# Altium PCB Ender-3.PcbDoc (part 11 of 14)
Units mil, origin at the board's own origin, x right, y up, seen from the top; angles counter-clockwise.
Board outline 3970.48 x 2769.68 mil, 2 copper layers (TopLayer, BottomLayer); 146 components, 136 nets, 669 pads, 614 vias.
Unrouted connection lines stored in the file: 1.
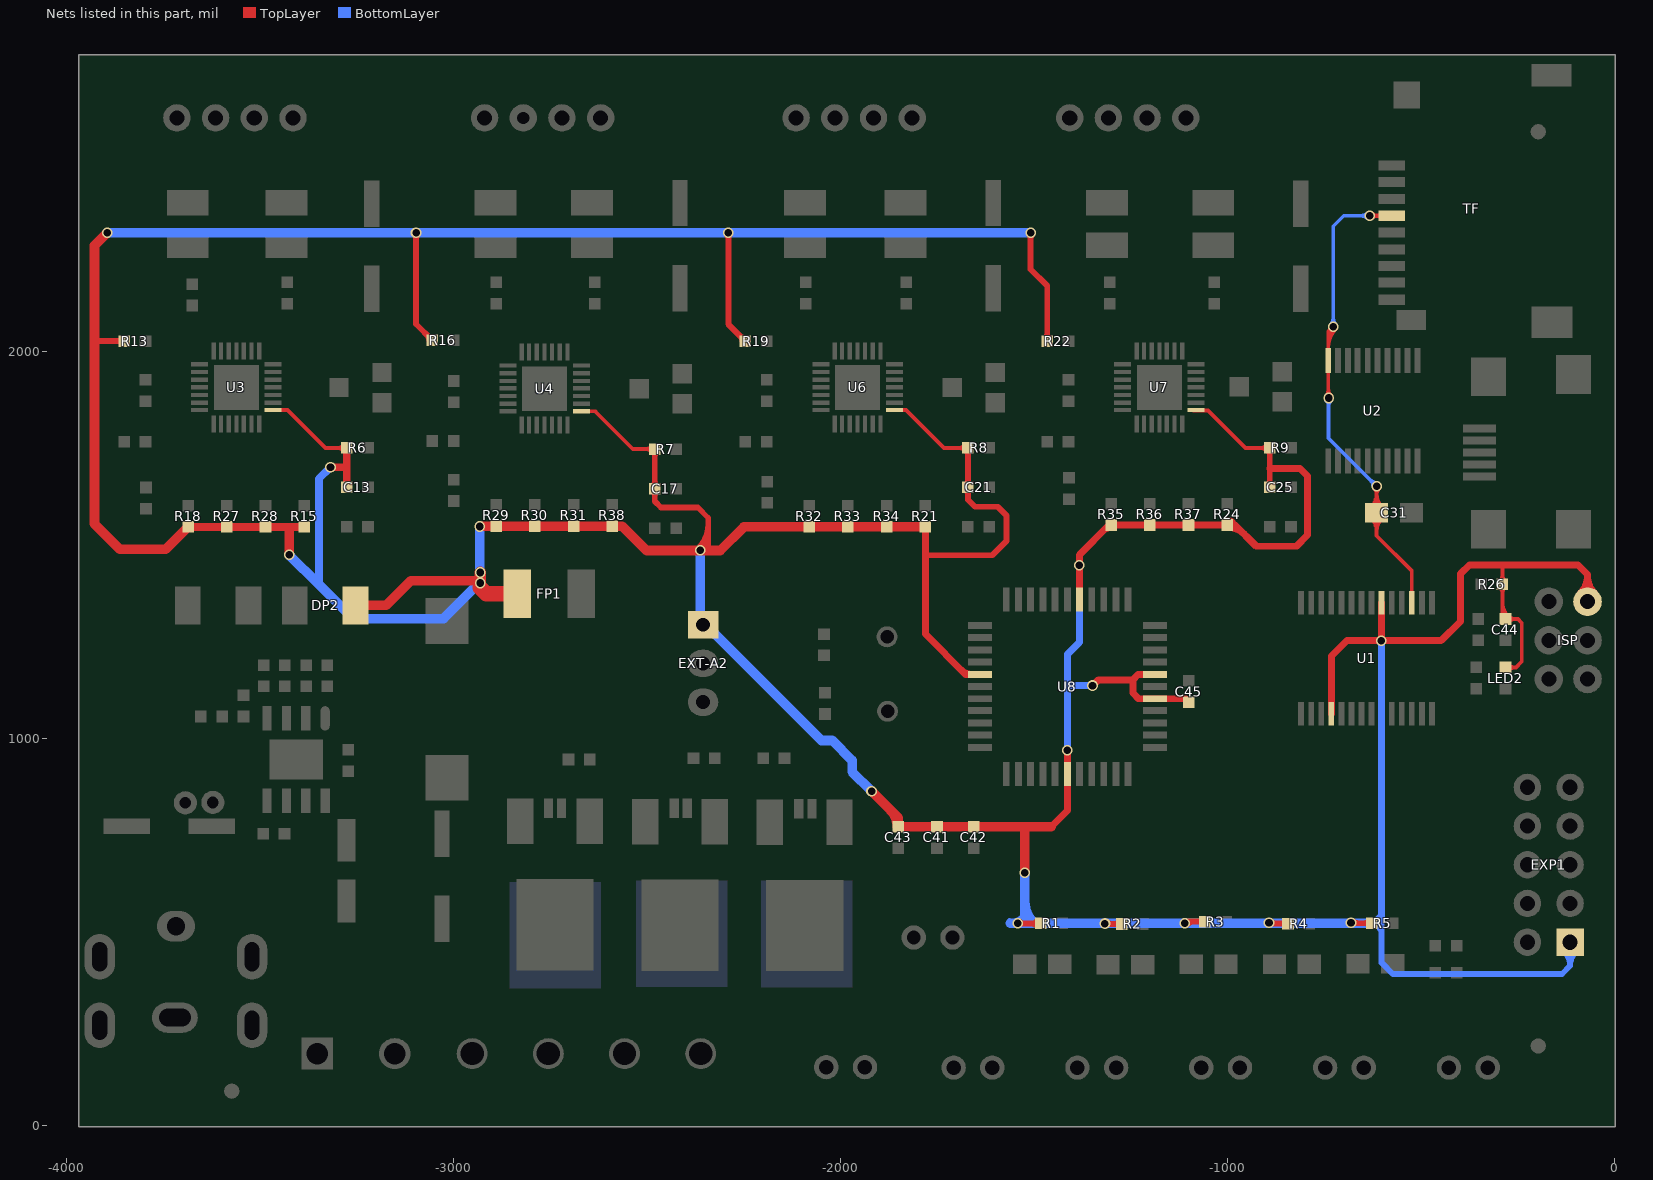
[diagram p11: the nets of this part, all layers, seen from the top]

## Via types
v1: diameter 28, hole 18, TopLayer to BottomLayer, tented both sides, 246 vias
v2: diameter 27.56, hole 19.68, TopLayer to BottomLayer, tented both sides, 196 vias
v3: diameter 20, hole 12, TopLayer to BottomLayer, tented both sides, 124 vias
v4: diameter 27.56, hole 11.81, TopLayer to BottomLayer, tented bottom, 16 vias
v5: diameter 27.56, hole 19.68, TopLayer to BottomLayer, 16 vias
v6: diameter 20, hole 12, TopLayer to BottomLayer, 12 vias
v7: diameter 28, hole 11.81, TopLayer to BottomLayer, tented both sides, 4 vias

## Nets (pads, with @x,y where several pads share a name; then routed paths per layer and width w, separated by ;. In a path a pad name is that pad's centre, name@x,y a point inside that pad or via, vN(x,y) a via of type N, cw(c..) or ccw(c..) an arc to the next point about the centre after c; other vN are vias at no path point) (continued)
VCC: C13.1 C17.1 C21.1 C25.1 C41.1 C42.1 C43.1 C44.1 C45.1 DP2.2 EXP1.1 EXT-A2.1 FP1.2 ISP.2 LED2.2 R1.2 R2.2 R3.2 R4.2 R5.2 R6.2 R7.2 R8.2 R9.2 R13.2 R15.2 R16.2 R18.2 R19.2 R21.2 R22.2 R24.2 R26.2 R27.2 R28.2 R29.2 R30.2 R31.2 R32.2 R33.2 R34.2 R35.2 R36.2 R37.2 R38.2 U1.4 U1.20 U3.15 U4.15 U6.15 U7.15 U8.5 U8.17 U8.27 U8.29 U8.38 | length 28320.6
  TopLayer w10: U3.15@-3465.62,1849.88 -3428.62,1849.88 -3330.58,1751.84 R6.2@-3275.62,1751.88 ; U4.15@-2669.54,1846.84 -2632.54,1846.84 ; -2632.54,1845.84 -2633.54,1845.84 -2536.54,1748.84 R7.2@-2479.54,1748.84 ; U6.15@-1867.54,1849.88 -1830.54,1849.88 -1732.54,1751.88 R8.2@-1670.62,1751.88 ; v2(-1110.54,523.84) v2@-1106.54,527.84 ; U7.15@-1087.54,1848.88 -1050.54,1848.88 -953.54,1751.88 R9.2@-890.62,1751.88 ; R26.2@-296.61,1392.77 cw(c-313.68,1375.7) -289.54,1375.7 cw(c-265.39,1375.7) R26.2@-282.46,1392.77 ; R26.2@-296.61,1406.91 ccw(c-313.68,1423.98) -289.54,1423.98 ccw(c-265.39,1423.98) R26.2@-282.46,1406.91 ; -289.54,1329.16 ccw(c-262.22,1329.16) C44.1@-281.54,1309.84 ; -289.54,1353.3 ccw(c-238.08,1353.3) -274.46,1316.91 ccw(c-257.39,1333.98) -257.39,1309.84 ccw(c-257.39,1285.7) C44.1@-274.46,1302.77 ; -289.54,1448.84 -289.54,1317.84 C44.1@-281.54,1309.84 ; LED2.2@-281.54,1184.84 -254.54,1184.84 -239.54,1199.84 -239.54,1299.84 -249.54,1309.84 C44.1@-281.54,1309.84 ; LED2.2@-274.46,1177.77 cw(c-257.39,1160.7) -257.39,1184.84 cw(c-257.39,1208.98) LED2.2@-274.46,1191.91 ; -3299.86,1751.84 ccw(c-3299.86,1776.12) R6.2@-3282.69,1758.95 ; -3299.86,1751.84 ccw(c-3299.86,1776.12) R6.2@-3282.69,1758.95 ; -3299.86,1751.84 ccw(c-3299.86,1776.12) R6.2@-3282.69,1758.95 ; -3299.86,1751.84 ccw(c-3299.86,1776.12) R6.2@-3282.69,1758.95 ; -3299.86,1751.84 ccw(c-3299.86,1776.12) R6.2@-3282.69,1758.95 ; -3299.86,1751.84 ccw(c-3299.86,1776.12) R6.2@-3282.69,1758.95 ; -3299.86,1751.84 ccw(c-3299.86,1776.12) R6.2@-3282.69,1758.95 ; -3299.86,1751.84 ccw(c-3299.86,1776.12) R6.2@-3282.69,1758.95 ; -3299.86,1751.84 ccw(c-3299.86,1776.12) R6.2@-3282.69,1758.95 ; -3299.67,1751.84 cw(c-3299.67,1727.83) R6.2@-3282.69,1744.81 ; -3299.67,1751.84 cw(c-3299.67,1727.83) R6.2@-3282.69,1744.81 ; -3299.67,1751.84 cw(c-3299.67,1727.83) R6.2@-3282.69,1744.81 ; -3299.67,1751.84 cw(c-3299.67,1727.83) R6.2@-3282.69,1744.81 ; -3299.67,1751.84 cw(c-3299.67,1727.83) R6.2@-3282.69,1744.81 ; -3299.67,1751.84 cw(c-3299.67,1727.83) R6.2@-3282.69,1744.81 ; -3299.67,1751.84 cw(c-3299.67,1727.83) R6.2@-3282.69,1744.81 ; -3299.67,1751.84 cw(c-3299.67,1727.83) R6.2@-3282.69,1744.81 ; -3299.67,1751.84 cw(c-3299.67,1727.83) R6.2@-3282.69,1744.81 ; -2503.68,1748.84 cw(c-2503.68,1724.7) R7.2@-2486.61,1741.77 ; -2503.68,1748.84 ccw(c-2503.68,1772.98) R7.2@-2486.61,1755.91 ; -2503.68,1748.84 cw(c-2503.68,1724.7) R7.2@-2486.61,1741.77 ; -2503.68,1748.84 ccw(c-2503.68,1772.98) R7.2@-2486.61,1755.91 ; -2503.68,1748.84 cw(c-2503.68,1724.7) R7.2@-2486.61,1741.77 ; -2503.68,1748.84 ccw(c-2503.68,1772.98) R7.2@-2486.61,1755.91 ; -2503.68,1748.84 cw(c-2503.68,1724.7) R7.2@-2486.61,1741.77 ; -2503.68,1748.84 ccw(c-2503.68,1772.98) R7.2@-2486.61,1755.91 ; -2503.68,1748.84 cw(c-2503.68,1724.7) R7.2@-2486.61,1741.77 ; -2503.68,1748.84 ccw(c-2503.68,1772.98) R7.2@-2486.61,1755.91 ; -2503.68,1748.84 ccw(c-2503.68,1772.98) R7.2@-2486.61,1755.91 ; -2503.68,1748.84 cw(c-2503.68,1724.7) R7.2@-2486.61,1741.77 ; -2503.68,1748.84 ccw(c-2503.68,1772.98) R7.2@-2486.61,1755.91 ; -2503.68,1748.84 cw(c-2503.68,1724.7) R7.2@-2486.61,1741.77 ; -2503.68,1748.84 ccw(c-2503.68,1772.98) R7.2@-2486.61,1755.91 ; -2503.68,1748.84 cw(c-2503.68,1724.7) R7.2@-2486.61,1741.77 ; -2503.68,1748.84 ccw(c-2503.68,1772.98) R7.2@-2486.61,1755.91 ; -2503.68,1748.84 cw(c-2503.68,1724.7) R7.2@-2486.61,1741.77 ; -1826.39,772.84 cw(c-1826.39,796.98) -1843.46,779.91 ccw(c-1826.39,796.98) -1826.39,772.84 ; -1826.39,772.84 ccw(c-1826.39,748.7) -1843.46,765.77 cw(c-1826.39,748.7) -1826.39,772.84 ; -1774.68,772.84 cw(c-1774.68,748.7) -1757.61,765.77 ccw(c-1774.68,748.7) -1774.68,772.84 ; -1774.68,772.84 ccw(c-1774.68,796.98) -1757.61,779.91 cw(c-1774.68,796.98) -1774.68,772.84 ; -1726.39,772.84 cw(c-1726.39,796.98) -1743.46,779.91 ccw(c-1726.39,796.98) -1726.39,772.84 ; -1726.39,772.84 ccw(c-1726.39,748.7) -1743.46,765.77 cw(c-1726.39,748.7) -1726.39,772.84 ; -1694.76,1751.88 cw(c-1694.76,1727.74) R8.2@-1677.69,1744.81 ; -1694.76,1751.88 ccw(c-1694.76,1776.02) R8.2@-1677.69,1758.95 ; -1694.76,1751.88 cw(c-1694.76,1727.74) R8.2@-1677.69,1744.81 ; -1694.76,1751.88 ccw(c-1694.76,1776.02) R8.2@-1677.69,1758.95 ; -1694.76,1751.88 cw(c-1694.76,1727.74) R8.2@-1677.69,1744.81 ; -1694.76,1751.88 ccw(c-1694.76,1776.02) R8.2@-1677.69,1758.95 ; -1694.76,1751.88 cw(c-1694.76,1727.74) R8.2@-1677.69,1744.81 ; -1694.76,1751.88 ccw(c-1694.76,1776.02) R8.2@-1677.69,1758.95 ; -1694.76,1751.88 cw(c-1694.76,1727.74) R8.2@-1677.69,1744.81 ; -1694.76,1751.88 ccw(c-1694.76,1776.02) R8.2@-1677.69,1758.95 ; -1694.76,1751.88 ccw(c-1694.76,1776.02) R8.2@-1677.69,1758.95 ; -1694.76,1751.88 cw(c-1694.76,1727.74) R8.2@-1677.69,1744.81 ; -1694.76,1751.88 ccw(c-1694.76,1776.02) R8.2@-1677.69,1758.95 ; -1694.76,1751.88 cw(c-1694.76,1727.74) R8.2@-1677.69,1744.81 ; -1694.76,1751.88 ccw(c-1694.76,1776.02) R8.2@-1677.69,1758.95 ; -1694.76,1751.88 cw(c-1694.76,1727.74) R8.2@-1677.69,1744.81 ; -1694.76,1751.88 ccw(c-1694.76,1776.02) R8.2@-1677.69,1758.95 ; -1694.76,1751.88 cw(c-1694.76,1727.74) R8.2@-1677.69,1744.81 ; -1679.68,772.84 cw(c-1679.68,748.7) -1662.61,765.77 ccw(c-1679.68,748.7) -1679.68,772.84 ; -1679.68,772.84 ccw(c-1679.68,796.98) -1662.61,779.91 cw(c-1679.68,796.98) -1679.68,772.84 ; -1631.39,772.84 cw(c-1631.39,796.98) -1648.46,779.91 ccw(c-1631.39,796.98) -1631.39,772.84 ; -1631.39,772.84 ccw(c-1631.39,748.7) -1648.46,765.77 cw(c-1631.39,748.7) -1631.39,772.84 ; -1413.54,877.19 cw(c-1403.88,877.19) -1410.71,884.01 ccw(c-1403.88,877.19) -1413.54,877.19 ; -1413.54,877.19 ccw(c-1423.19,877.19) -1416.36,884.01 cw(c-1423.19,877.19) -1413.54,877.19 ; -914.76,1751.88 cw(c-914.76,1727.74) R9.2@-897.69,1744.81 ; -914.76,1751.88 ccw(c-914.76,1776.02) R9.2@-897.69,1758.95 ; -914.76,1751.88 cw(c-914.76,1727.74) R9.2@-897.69,1744.81 ; -914.76,1751.88 ccw(c-914.76,1776.02) R9.2@-897.69,1758.95 ; -914.76,1751.88 cw(c-914.76,1727.74) R9.2@-897.69,1744.81 ; -914.76,1751.88 ccw(c-914.76,1776.02) R9.2@-897.69,1758.95 ; -914.76,1751.88 cw(c-914.76,1727.74) R9.2@-897.69,1744.81 ; -914.76,1751.88 ccw(c-914.76,1776.02) R9.2@-897.69,1758.95 ; -914.76,1751.88 cw(c-914.76,1727.74) R9.2@-897.69,1744.81 ; -914.76,1751.88 ccw(c-914.76,1776.02) R9.2@-897.69,1758.95 ; -914.76,1751.88 ccw(c-914.76,1776.02) R9.2@-897.69,1758.95 ; -914.76,1751.88 cw(c-914.76,1727.74) R9.2@-897.69,1744.81 ; -914.76,1751.88 ccw(c-914.76,1776.02) R9.2@-897.69,1758.95 ; -914.76,1751.88 cw(c-914.76,1727.74) R9.2@-897.69,1744.81 ; -914.76,1751.88 ccw(c-914.76,1776.02) R9.2@-897.69,1758.95 ; -914.76,1751.88 cw(c-914.76,1727.74) R9.2@-897.69,1744.81 ; -914.76,1751.88 ccw(c-914.76,1776.02) R9.2@-897.69,1758.95 ; -914.76,1751.88 cw(c-914.76,1727.74) R9.2@-897.69,1744.81
  TopLayer w14: -2368.54,1597.84 -2341.54,1570.84
  TopLayer w15: -3915.57,2027.88 R13.2@-3850.62,2027.88 ; v2(-3096.54,2307.84) -3096.54,2071.84 R16.2@-3054.54,2029.84 ; R7.2@-2479.54,1748.84 -2479.54,1613.84 -2463.54,1597.84 -2368.54,1597.84 ; -2341.54,1486.84 -2341.54,1570.84 ; v2(-2289.54,2307.84) -2289.54,2071.79 R19.2@-2245.62,2027.88 ; -1779.62,1474.84 -1607.54,1474.84 -1570.54,1511.84 -1570.54,1576.84 -1593.54,1599.84 -1652.54,1599.84 -1670.62,1617.93 R8.2@-1670.62,1751.88 ; v2@-1540.54,522.84 R1.2@-1488.54,522.84 ; v2(-1508.54,2307.84) -1508.54,2213.84 -1465.62,2170.93 R22.2@-1465.62,2027.88 ; -1503.06,522.84 ccw(c-1503.06,544.36) R1.2@-1487.84,529.15 ; -1498.23,522.84 cw(c-1498.23,508.15) R1.2@-1487.84,518.54 ; v2@-1315.54,521.84 R2.2@-1273.54,521.84 ; v2@-1106.54,527.84 R3.2@-1058.54,527.84 ; C25.1@-890.62,1649.88 R9.2@-890.62,1751.88 ; v2@-890.54,522.84 R4.2@-843.54,522.84 ; v2@-679.54,523.84 R5.2@-627.54,523.84 ; -3868.73,2027.88 cw(c-3868.73,2009.77) R13.2@-3855.93,2022.58 ; -3868.73,2027.88 ccw(c-3868.73,2045.99) R13.2@-3855.93,2033.18 ; -3868.73,2027.88 cw(c-3868.73,2009.77) R13.2@-3855.93,2022.58 ; -3868.73,2027.88 ccw(c-3868.73,2045.99) R13.2@-3855.93,2033.18 ; -3868.73,2027.88 cw(c-3868.73,2009.77) R13.2@-3855.93,2022.58 ; -3868.73,2027.88 ccw(c-3868.73,2045.99) R13.2@-3855.93,2033.18 ; -3868.73,2027.88 cw(c-3868.73,2009.77) R13.2@-3855.93,2022.58 ; -3868.73,2027.88 ccw(c-3868.73,2045.99) R13.2@-3855.93,2033.18 ; -3868.73,2027.88 cw(c-3868.73,2009.77) R13.2@-3855.93,2022.58 ; -3868.73,2027.88 ccw(c-3868.73,2045.99) R13.2@-3855.93,2033.18 ; -3868.73,2027.88 ccw(c-3868.73,2045.99) R13.2@-3855.93,2033.18 ; -3868.73,2027.88 cw(c-3868.73,2009.77) R13.2@-3855.93,2022.58 ; -3868.73,2027.88 ccw(c-3868.73,2045.99) R13.2@-3855.93,2033.18 ; -3868.73,2027.88 cw(c-3868.73,2009.77) R13.2@-3855.93,2022.58 ; -3868.73,2027.88 ccw(c-3868.73,2045.99) R13.2@-3855.93,2033.18 ; -3868.73,2027.88 cw(c-3868.73,2009.77) R13.2@-3855.93,2022.58 ; -3868.73,2027.88 ccw(c-3868.73,2045.99) R13.2@-3855.93,2033.18 ; -3868.73,2027.88 cw(c-3868.73,2009.77) R13.2@-3855.93,2022.58 ; v2@-3100.98,2303.4 cw(c-3111.7,2292.68) -3096.54,2292.68 ; v2@-3100.98,2303.4 cw(c-3111.7,2292.68) -3096.54,2292.68 ; v2@-3100.98,2303.4 cw(c-3111.7,2292.68) -3096.54,2292.68 ; v2@-3100.98,2303.4 cw(c-3111.7,2292.68) -3096.54,2292.68 ; v2@-3100.98,2303.4 cw(c-3111.7,2292.68) -3096.54,2292.68 ; v2@-3100.98,2303.4 cw(c-3111.7,2292.68) -3096.54,2292.68 ; v2@-3100.98,2303.4 cw(c-3111.7,2292.68) -3096.54,2292.68 ; v2@-3100.98,2303.4 cw(c-3111.7,2292.68) -3096.54,2292.68 ; v2@-3100.98,2303.4 cw(c-3111.7,2292.68) -3096.54,2292.68 ; -3096.54,2292.68 cw(c-3081.38,2292.68) v2@-3092.1,2303.4 ; -3096.54,2292.68 cw(c-3081.38,2292.68) v2@-3092.1,2303.4 ; -3096.54,2292.68 cw(c-3081.38,2292.68) v2@-3092.1,2303.4 ; -3096.54,2292.68 cw(c-3081.38,2292.68) v2@-3092.1,2303.4 ; -3096.54,2292.68 cw(c-3081.38,2292.68) v2@-3092.1,2303.4 ; -3096.54,2292.68 cw(c-3081.38,2292.68) v2@-3092.1,2303.4 ; -3096.54,2292.68 cw(c-3081.38,2292.68) v2@-3092.1,2303.4 ; -3096.54,2292.68 cw(c-3081.38,2292.68) v2@-3092.1,2303.4 ; -3096.54,2292.68 cw(c-3081.38,2292.68) v2@-3092.1,2303.4 ; R16.2@-3067.34,2042.65 cw(c-3080.14,2029.84) R16.2@-3062.04,2029.84 ; R16.2@-3067.34,2042.65 ccw(c-3054.54,2055.45) R16.2@-3054.54,2037.34 ; R16.2@-3067.34,2042.65 cw(c-3080.14,2029.84) R16.2@-3062.04,2029.84 ; R16.2@-3067.34,2042.65 ccw(c-3054.54,2055.45) R16.2@-3054.54,2037.34 ; R16.2@-3067.34,2042.65 cw(c-3080.14,2029.84) R16.2@-3062.04,2029.84 ; R16.2@-3067.34,2042.65 ccw(c-3054.54,2055.45) R16.2@-3054.54,2037.34 ; R16.2@-3067.34,2042.65 cw(c-3080.14,2029.84) R16.2@-3062.04,2029.84 ; R16.2@-3067.34,2042.65 ccw(c-3054.54,2055.45) R16.2@-3054.54,2037.34 ; R16.2@-3067.34,2042.65 cw(c-3080.14,2029.84) R16.2@-3062.04,2029.84 ; R16.2@-3067.34,2042.65 ccw(c-3054.54,2055.45) R16.2@-3054.54,2037.34 ; R16.2@-3067.34,2042.65 ccw(c-3054.54,2055.45) R16.2@-3054.54,2037.34 ; R16.2@-3067.34,2042.65 cw(c-3080.14,2029.84) R16.2@-3062.04,2029.84 ; R16.2@-3067.34,2042.65 ccw(c-3054.54,2055.45) R16.2@-3054.54,2037.34 ; R16.2@-3067.34,2042.65 cw(c-3080.14,2029.84) R16.2@-3062.04,2029.84 ; R16.2@-3067.34,2042.65 ccw(c-3054.54,2055.45) R16.2@-3054.54,2037.34 ; R16.2@-3067.34,2042.65 cw(c-3080.14,2029.84) R16.2@-3062.04,2029.84 ; R16.2@-3067.34,2042.65 ccw(c-3054.54,2055.45) R16.2@-3054.54,2037.34 ; R16.2@-3067.34,2042.65 cw(c-3080.14,2029.84) R16.2@-3062.04,2029.84 ; C17.1@-2484.84,1641.54 cw(c-2497.64,1628.74) -2479.54,1628.74 ; C17.1@-2484.84,1641.54 cw(c-2497.64,1628.74) -2479.54,1628.74 ; C17.1@-2484.84,1641.54 cw(c-2497.64,1628.74) -2479.54,1628.74 ; C17.1@-2484.84,1641.54 cw(c-2497.64,1628.74) -2479.54,1628.74 ; C17.1@-2484.84,1641.54 cw(c-2497.64,1628.74) -2479.54,1628.74 ; C17.1@-2484.84,1641.54 cw(c-2497.64,1628.74) -2479.54,1628.74 ; C17.1@-2484.84,1641.54 cw(c-2497.64,1628.74) -2479.54,1628.74 ; C17.1@-2484.84,1641.54 cw(c-2497.64,1628.74) -2479.54,1628.74 ; C17.1@-2484.84,1641.54 cw(c-2497.64,1628.74) -2479.54,1628.74 ; C17.1@-2484.84,1652.15 ccw(c-2497.64,1664.95) -2479.54,1664.95 ; C17.1@-2484.84,1652.15 ccw(c-2497.64,1664.95) -2479.54,1664.95 ; C17.1@-2484.84,1652.15 ccw(c-2497.64,1664.95) -2479.54,1664.95 ; C17.1@-2484.84,1652.15 ccw(c-2497.64,1664.95) -2479.54,1664.95 ; C17.1@-2484.84,1652.15 ccw(c-2497.64,1664.95) -2479.54,1664.95 ; C17.1@-2484.84,1652.15 ccw(c-2497.64,1664.95) -2479.54,1664.95 ; C17.1@-2484.84,1652.15 ccw(c-2497.64,1664.95) -2479.54,1664.95 ; C17.1@-2484.84,1652.15 ccw(c-2497.64,1664.95) -2479.54,1664.95 ; C17.1@-2484.84,1652.15 ccw(c-2497.64,1664.95) -2479.54,1664.95 ; R7.2@-2484.84,1743.54 cw(c-2497.64,1730.74) -2479.54,1730.74 ; R7.2@-2484.84,1743.54 cw(c-2497.64,1730.74) -2479.54,1730.74 ; R7.2@-2484.84,1743.54 cw(c-2497.64,1730.74) -2479.54,1730.74 ; R7.2@-2484.84,1743.54 cw(c-2497.64,1730.74) -2479.54,1730.74 ; R7.2@-2484.84,1743.54 cw(c-2497.64,1730.74) -2479.54,1730.74 ; R7.2@-2484.84,1743.54 cw(c-2497.64,1730.74) -2479.54,1730.74 ; R7.2@-2484.84,1743.54 cw(c-2497.64,1730.74) -2479.54,1730.74 ; R7.2@-2484.84,1743.54 cw(c-2497.64,1730.74) -2479.54,1730.74 ; R7.2@-2484.84,1743.54 cw(c-2497.64,1730.74) -2479.54,1730.74 ; -2479.54,1628.74 cw(c-2461.43,1628.74) C17.1@-2474.23,1641.54 ; -2479.54,1628.74 cw(c-2461.43,1628.74) C17.1@-2474.23,1641.54 ; -2479.54,1628.74 cw(c-2461.43,1628.74) C17.1@-2474.23,1641.54 ; -2479.54,1628.74 cw(c-2461.43,1628.74) C17.1@-2474.23,1641.54 ; -2479.54,1628.74 cw(c-2461.43,1628.74) C17.1@-2474.23,1641.54 ; -2479.54,1628.74 cw(c-2461.43,1628.74) C17.1@-2474.23,1641.54 ; -2479.54,1628.74 cw(c-2461.43,1628.74) C17.1@-2474.23,1641.54 ; -2479.54,1628.74 cw(c-2461.43,1628.74) C17.1@-2474.23,1641.54 ; -2479.54,1628.74 cw(c-2461.43,1628.74) C17.1@-2474.23,1641.54 ; -2479.54,1664.95 ccw(c-2461.43,1664.95) C17.1@-2474.23,1652.15 ; -2479.54,1664.95 ccw(c-2461.43,1664.95) C17.1@-2474.23,1652.15 ; -2479.54,1664.95 ccw(c-2461.43,1664.95) C17.1@-2474.23,1652.15 ; -2479.54,1664.95 ccw(c-2461.43,1664.95) C17.1@-2474.23,1652.15 ; -2479.54,1664.95 ccw(c-2461.43,1664.95) C17.1@-2474.23,1652.15 ; -2479.54,1664.95 ccw(c-2461.43,1664.95) C17.1@-2474.23,1652.15 ; -2479.54,1664.95 ccw(c-2461.43,1664.95) C17.1@-2474.23,1652.15 ; -2479.54,1664.95 ccw(c-2461.43,1664.95) C17.1@-2474.23,1652.15 ; -2479.54,1664.95 ccw(c-2461.43,1664.95) C17.1@-2474.23,1652.15 ; -2479.54,1730.74 cw(c-2461.43,1730.74) R7.2@-2474.23,1743.54 ; -2479.54,1730.74 cw(c-2461.43,1730.74) R7.2@-2474.23,1743.54 ; -2479.54,1730.74 cw(c-2461.43,1730.74) R7.2@-2474.23,1743.54 ; -2479.54,1730.74 cw(c-2461.43,1730.74) R7.2@-2474.23,1743.54 ; -2479.54,1730.74 cw(c-2461.43,1730.74) R7.2@-2474.23,1743.54 ; -2479.54,1730.74 cw(c-2461.43,1730.74) R7.2@-2474.23,1743.54 ; -2479.54,1730.74 cw(c-2461.43,1730.74) R7.2@-2474.23,1743.54 ; -2479.54,1730.74 cw(c-2461.43,1730.74) R7.2@-2474.23,1743.54 ; -2479.54,1730.74 cw(c-2461.43,1730.74) R7.2@-2474.23,1743.54 ; v2@-2366.98,1492.28 ccw(c-2428.39,1553.7) -2341.54,1553.7 ; v2@-2366.98,1492.28 ccw(c-2428.39,1553.7) -2341.54,1553.7 ; v2@-2366.98,1492.28 ccw(c-2428.39,1553.7) -2341.54,1553.7 ; v2@-2366.98,1492.28 ccw(c-2428.39,1553.7) -2341.54,1553.7 ; v2@-2366.98,1492.28 ccw(c-2428.39,1553.7) -2341.54,1553.7 ; v2@-2366.98,1492.28 ccw(c-2428.39,1553.7) -2341.54,1553.7 ; v2@-2366.98,1492.28 ccw(c-2428.39,1553.7) -2341.54,1553.7 ; v2@-2356.37,1481.68 ccw(c-2392.18,1517.49) -2341.54,1517.49 ; v2@-2356.37,1481.68 ccw(c-2392.18,1517.49) -2341.54,1517.49 ; v2@-2356.37,1481.68 ccw(c-2392.18,1517.49) -2341.54,1517.49 ; v2@-2356.37,1481.68 ccw(c-2392.18,1517.49) -2341.54,1517.49 ; v2@-2356.37,1481.68 ccw(c-2392.18,1517.49) -2341.54,1517.49 ; v2@-2356.37,1481.68 ccw(c-2392.18,1517.49) -2341.54,1517.49 ; v2@-2356.37,1481.68 ccw(c-2392.18,1517.49) -2341.54,1517.49 ; v2@-2293.98,2303.4 cw(c-2304.7,2292.68) -2289.54,2292.68 ; v2@-2293.98,2303.4 cw(c-2304.7,2292.68) -2289.54,2292.68 ; v2@-2293.98,2303.4 cw(c-2304.7,2292.68) -2289.54,2292.68 ; v2@-2293.98,2303.4 cw(c-2304.7,2292.68) -2289.54,2292.68 ; v2@-2293.98,2303.4 cw(c-2304.7,2292.68) -2289.54,2292.68 ; v2@-2293.98,2303.4 cw(c-2304.7,2292.68) -2289.54,2292.68 ; v2@-2293.98,2303.4 cw(c-2304.7,2292.68) -2289.54,2292.68 ; v2@-2293.98,2303.4 cw(c-2304.7,2292.68) -2289.54,2292.68 ; v2@-2293.98,2303.4 cw(c-2304.7,2292.68) -2289.54,2292.68 ; -2289.54,2292.68 cw(c-2274.38,2292.68) v2@-2285.1,2303.4 ; -2289.54,2292.68 cw(c-2274.38,2292.68) v2@-2285.1,2303.4 ; -2289.54,2292.68 cw(c-2274.38,2292.68) v2@-2285.1,2303.4 ; -2289.54,2292.68 cw(c-2274.38,2292.68) v2@-2285.1,2303.4 ; -2289.54,2292.68 cw(c-2274.38,2292.68) v2@-2285.1,2303.4 ; -2289.54,2292.68 cw(c-2274.38,2292.68) v2@-2285.1,2303.4 ; -2289.54,2292.68 cw(c-2274.38,2292.68) v2@-2285.1,2303.4 ; -2289.54,2292.68 cw(c-2274.38,2292.68) v2@-2285.1,2303.4 ; -2289.54,2292.68 cw(c-2274.38,2292.68) v2@-2285.1,2303.4 ; R19.2@-2258.43,2040.69 cw(c-2271.23,2027.88) R19.2@-2253.12,2027.88 ; R19.2@-2258.43,2040.68 ccw(c-2245.62,2053.49) R19.2@-2245.62,2035.38 ; R19.2@-2258.43,2040.69 cw(c-2271.23,2027.88) R19.2@-2253.12,2027.88 ; R19.2@-2258.43,2040.68 ccw(c-2245.62,2053.49) R19.2@-2245.62,2035.38 ; R19.2@-2258.43,2040.69 cw(c-2271.23,2027.88) R19.2@-2253.12,2027.88 ; R19.2@-2258.43,2040.68 ccw(c-2245.62,2053.49) R19.2@-2245.62,2035.38 ; R19.2@-2258.43,2040.69 cw(c-2271.23,2027.88) R19.2@-2253.12,2027.88 ; R19.2@-2258.43,2040.68 ccw(c-2245.62,2053.49) R19.2@-2245.62,2035.38 ; R19.2@-2258.43,2040.69 cw(c-2271.23,2027.88) R19.2@-2253.12,2027.88 ; R19.2@-2258.43,2040.68 ccw(c-2245.62,2053.49) R19.2@-2245.62,2035.38 ; R19.2@-2258.43,2040.68 ccw(c-2245.62,2053.49) R19.2@-2245.62,2035.38 ; R19.2@-2258.43,2040.69 cw(c-2271.23,2027.88) R19.2@-2253.12,2027.88 ; R19.2@-2258.43,2040.68 ccw(c-2245.62,2053.49) R19.2@-2245.62,2035.38 ; R19.2@-2258.43,2040.69 cw(c-2271.23,2027.88) R19.2@-2253.12,2027.88 ; R19.2@-2258.43,2040.68 ccw(c-2245.62,2053.49) R19.2@-2245.62,2035.38 ; R19.2@-2258.43,2040.69 cw(c-2271.23,2027.88) R19.2@-2253.12,2027.88 ; R19.2@-2258.43,2040.68 ccw(c-2245.62,2053.49) R19.2@-2245.62,2035.38 ; R19.2@-2258.43,2040.69 cw(c-2271.23,2027.88) R19.2@-2253.12,2027.88 ; C21.1@-1675.93,1644.58 cw(c-1688.73,1631.77) -1670.62,1631.77 ; C21.1@-1675.93,1644.58 cw(c-1688.73,1631.77) -1670.62,1631.77 ; C21.1@-1675.93,1644.58 cw(c-1688.73,1631.77) -1670.62,1631.77 ; C21.1@-1675.93,1644.58 cw(c-1688.73,1631.77) -1670.62,1631.77 ; C21.1@-1675.93,1644.58 cw(c-1688.73,1631.77) -1670.62,1631.77 ; C21.1@-1675.93,1644.58 cw(c-1688.73,1631.77) -1670.62,1631.77 ; C21.1@-1675.93,1644.58 cw(c-1688.73,1631.77) -1670.62,1631.77 ; C21.1@-1675.93,1644.58 cw(c-1688.73,1631.77) -1670.62,1631.77 ; C21.1@-1675.93,1644.58 cw(c-1688.73,1631.77) -1670.62,1631.77 ; C21.1@-1675.93,1655.18 ccw(c-1688.73,1667.99) -1670.62,1667.99 ; C21.1@-1675.93,1655.18 ccw(c-1688.73,1667.99) -1670.62,1667.99 ; C21.1@-1675.93,1655.18 ccw(c-1688.73,1667.99) -1670.62,1667.99 ; C21.1@-1675.93,1655.18 ccw(c-1688.73,1667.99) -1670.62,1667.99 ; C21.1@-1675.93,1655.18 ccw(c-1688.73,1667.99) -1670.62,1667.99 ; C21.1@-1675.93,1655.18 ccw(c-1688.73,1667.99) -1670.62,1667.99 ; C21.1@-1675.93,1655.18 ccw(c-1688.73,1667.99) -1670.62,1667.99 ; C21.1@-1675.93,1655.18 ccw(c-1688.73,1667.99) -1670.62,1667.99 ; C21.1@-1675.93,1655.18 ccw(c-1688.73,1667.99) -1670.62,1667.99 ; R8.2@-1675.93,1746.58 cw(c-1688.73,1733.77) -1670.62,1733.77 ; R8.2@-1675.93,1746.58 cw(c-1688.73,1733.77) -1670.62,1733.77 ; R8.2@-1675.93,1746.58 cw(c-1688.73,1733.77) -1670.62,1733.77 ; R8.2@-1675.93,1746.58 cw(c-1688.73,1733.77) -1670.62,1733.77 ; R8.2@-1675.93,1746.58 cw(c-1688.73,1733.77) -1670.62,1733.77 ; R8.2@-1675.93,1746.58 cw(c-1688.73,1733.77) -1670.62,1733.77 ; R8.2@-1675.93,1746.58 cw(c-1688.73,1733.77) -1670.62,1733.77 ; R8.2@-1675.93,1746.58 cw(c-1688.73,1733.77) -1670.62,1733.77 ; R8.2@-1675.93,1746.58 cw(c-1688.73,1733.77) -1670.62,1733.77 ; -1670.62,1631.77 cw(c-1652.52,1631.77) C21.1@-1665.32,1644.58 ; -1670.62,1631.77 cw(c-1652.52,1631.77) C21.1@-1665.32,1644.58 ; -1670.62,1631.77 cw(c-1652.52,1631.77) C21.1@-1665.32,1644.58 ; -1670.62,1631.77 cw(c-1652.52,1631.77) C21.1@-1665.32,1644.58 ; -1670.62,1631.77 cw(c-1652.52,1631.77) C21.1@-1665.32,1644.58 ; -1670.62,1631.77 cw(c-1652.52,1631.77) C21.1@-1665.32,1644.58 ; -1670.62,1631.77 cw(c-1652.52,1631.77) C21.1@-1665.32,1644.58 ; -1670.62,1631.77 cw(c-1652.52,1631.77) C21.1@-1665.32,1644.58 ; -1670.62,1631.77 cw(c-1652.52,1631.77) C21.1@-1665.32,1644.58 ; -1670.62,1667.99 ccw(c-1652.52,1667.99) C21.1@-1665.32,1655.18 ; -1670.62,1667.99 ccw(c-1652.52,1667.99) C21.1@-1665.32,1655.18 ; -1670.62,1667.99 ccw(c-1652.52,1667.99) C21.1@-1665.32,1655.18 ; -1670.62,1667.99 ccw(c-1652.52,1667.99) C21.1@-1665.32,1655.18 ; -1670.62,1667.99 ccw(c-1652.52,1667.99) C21.1@-1665.32,1655.18 ; -1670.62,1667.99 ccw(c-1652.52,1667.99) C21.1@-1665.32,1655.18 ; -1670.62,1667.99 ccw(c-1652.52,1667.99) C21.1@-1665.32,1655.18 ; -1670.62,1667.99 ccw(c-1652.52,1667.99) C21.1@-1665.32,1655.18 ; -1670.62,1667.99 ccw(c-1652.52,1667.99) C21.1@-1665.32,1655.18 ; -1670.62,1733.78 cw(c-1652.52,1733.78) R8.2@-1665.32,1746.58 ; -1670.62,1733.78 cw(c-1652.52,1733.78) R8.2@-1665.32,1746.58 ; -1670.62,1733.78 cw(c-1652.52,1733.78) R8.2@-1665.32,1746.58 ; -1670.62,1733.78 cw(c-1652.52,1733.78) R8.2@-1665.32,1746.58 ; -1670.62,1733.78 cw(c-1652.52,1733.78) R8.2@-1665.32,1746.58 ; -1670.62,1733.78 cw(c-1652.52,1733.78) R8.2@-1665.32,1746.58 ; -1670.62,1733.78 cw(c-1652.52,1733.78) R8.2@-1665.32,1746.58 ; -1670.62,1733.78 cw(c-1652.52,1733.78) R8.2@-1665.32,1746.58 ; -1670.62,1733.78 cw(c-1652.52,1733.78) R8.2@-1665.32,1746.58 ; v2@-1537.1,528.28 ccw(c-1523.96,541.42) -1523.96,522.84 ; v2@-1537.1,528.28 ccw(c-1523.96,541.42) -1523.96,522.84 ; v2@-1537.1,528.28 ccw(c-1523.96,541.42) -1523.96,522.84 ; v2@-1537.1,528.28 ccw(c-1523.96,541.42) -1523.96,522.84 ; v2@-1537.1,528.28 ccw(c-1523.96,541.42) -1523.96,522.84 ; v2@-1537.1,528.28 ccw(c-1523.96,541.42) -1523.96,522.84 ; v2@-1537.1,528.28 ccw(c-1523.96,541.42) -1523.96,522.84 ; v2@-1537.1,528.28 ccw(c-1523.96,541.42) -1523.96,522.84 ; v2@-1537.1,528.28 ccw(c-1523.96,541.42) -1523.96,522.84 ; v2@-1512.98,2303.4 cw(c-1523.7,2292.68) -1508.54,2292.68 ; v2@-1512.98,2303.4 cw(c-1523.7,2292.68) -1508.54,2292.68 ; v2@-1512.98,2303.4 cw(c-1523.7,2292.68) -1508.54,2292.68 ; v2@-1512.98,2303.4 cw(c-1523.7,2292.68) -1508.54,2292.68 ; v2@-1512.98,2303.4 cw(c-1523.7,2292.68) -1508.54,2292.68 ; v2@-1512.98,2303.4 cw(c-1523.7,2292.68) -1508.54,2292.68 ; v2@-1512.98,2303.4 cw(c-1523.7,2292.68) -1508.54,2292.68 ; v2@-1512.98,2303.4 cw(c-1523.7,2292.68) -1508.54,2292.68 ; v2@-1512.98,2303.4 cw(c-1523.7,2292.68) -1508.54,2292.68 ; -1508.54,2292.68 cw(c-1493.38,2292.68) v2@-1504.1,2303.4 ; -1508.54,2292.68 cw(c-1493.38,2292.68) v2@-1504.1,2303.4 ; -1508.54,2292.68 cw(c-1493.38,2292.68) v2@-1504.1,2303.4 ; -1508.54,2292.68 cw(c-1493.38,2292.68) v2@-1504.1,2303.4 ; -1508.54,2292.68 cw(c-1493.38,2292.68) v2@-1504.1,2303.4 ; -1508.54,2292.68 cw(c-1493.38,2292.68) v2@-1504.1,2303.4 ; -1508.54,2292.68 cw(c-1493.38,2292.68) v2@-1504.1,2303.4 ; -1508.54,2292.68 cw(c-1493.38,2292.68) v2@-1504.1,2303.4 ; -1508.54,2292.68 cw(c-1493.38,2292.68) v2@-1504.1,2303.4 ; -1506.64,522.84 cw(c-1506.64,504.74) R1.2@-1493.84,517.54 ; -1506.64,522.84 ccw(c-1506.64,540.95) R1.2@-1493.84,528.15 ; -1506.64,522.84 cw(c-1506.64,504.74) R1.2@-1493.84,517.54 ; -1506.64,522.84 ccw(c-1506.64,540.95) R1.2@-1493.84,528.15 ; -1506.64,522.84 cw(c-1506.64,504.74) R1.2@-1493.84,517.54 ; -1506.64,522.84 ccw(c-1506.64,540.95) R1.2@-1493.84,528.15 ; -1506.64,522.84 cw(c-1506.64,504.74) R1.2@-1493.84,517.54 ; -1506.64,522.84 ccw(c-1506.64,540.95) R1.2@-1493.84,528.15 ; -1506.64,522.84 cw(c-1506.64,504.74) R1.2@-1493.84,517.54 ; -1506.64,522.84 ccw(c-1506.64,540.95) R1.2@-1493.84,528.15 ; -1506.64,522.84 ccw(c-1506.64,540.95) R1.2@-1493.84,528.15 ; -1506.64,522.84 cw(c-1506.64,504.74) R1.2@-1493.84,517.54 ; -1506.64,522.84 ccw(c-1506.64,540.95) R1.2@-1493.84,528.15 ; -1506.64,522.84 cw(c-1506.64,504.74) R1.2@-1493.84,517.54 ; -1506.64,522.84 ccw(c-1506.64,540.95) R1.2@-1493.84,528.15 ; -1506.64,522.84 cw(c-1506.64,504.74) R1.2@-1493.84,517.54 ; R22.2@-1470.93,2033.18 ccw(c-1483.73,2045.99) -1465.62,2045.99 ; R22.2@-1470.93,2033.18 ccw(c-1483.73,2045.99) -1465.62,2045.99 ; R22.2@-1470.93,2033.18 ccw(c-1483.73,2045.99) -1465.62,2045.99 ; R22.2@-1470.93,2033.18 ccw(c-1483.73,2045.99) -1465.62,2045.99 ; R22.2@-1470.93,2033.18 ccw(c-1483.73,2045.99) -1465.62,2045.99 ; R22.2@-1470.93,2033.18 ccw(c-1483.73,2045.99) -1465.62,2045.99 ; R22.2@-1470.93,2033.18 ccw(c-1483.73,2045.99) -1465.62,2045.99 ; R22.2@-1470.93,2033.18 ccw(c-1483.73,2045.99) -1465.62,2045.99 ; R22.2@-1470.93,2033.18 ccw(c-1483.73,2045.99) -1465.62,2045.99 ; -1465.62,2045.99 ccw(c-1447.52,2045.99) R22.2@-1460.32,2033.18 ; -1465.62,2045.99 ccw(c-1447.52,2045.99) R22.2@-1460.32,2033.18 ; -1465.62,2045.99 ccw(c-1447.52,2045.99) R22.2@-1460.32,2033.18 ; -1465.62,2045.99 ccw(c-1447.52,2045.99) R22.2@-1460.32,2033.18 ; -1465.62,2045.99 ccw(c-1447.52,2045.99) R22.2@-1460.32,2033.18 ; -1465.62,2045.99 ccw(c-1447.52,2045.99) R22.2@-1460.32,2033.18 ; -1465.62,2045.99 ccw(c-1447.52,2045.99) R22.2@-1460.32,2033.18 ; -1465.62,2045.99 ccw(c-1447.52,2045.99) R22.2@-1460.32,2033.18 ; -1465.62,2045.99 ccw(c-1447.52,2045.99) R22.2@-1460.32,2033.18 ; v2@-1312.1,527.28 ccw(c-1298.96,540.42) -1298.96,521.84 ; v2@-1312.1,527.28 ccw(c-1298.96,540.42) -1298.96,521.84 ; v2@-1312.1,527.28 ccw(c-1298.96,540.42) -1298.96,521.84 ; v2@-1312.1,527.28 ccw(c-1298.96,540.42) -1298.96,521.84 ; v2@-1312.1,527.28 ccw(c-1298.96,540.42) -1298.96,521.84 ; v2@-1312.1,527.28 ccw(c-1298.96,540.42) -1298.96,521.84 ; v2@-1312.1,527.28 ccw(c-1298.96,540.42) -1298.96,521.84 ; v2@-1312.1,527.28 ccw(c-1298.96,540.42) -1298.96,521.84 ; v2@-1312.1,527.28 ccw(c-1298.96,540.42) -1298.96,521.84 ; -1291.64,521.84 cw(c-1291.64,503.74) R2.2@-1278.84,516.54 ; -1291.64,521.84 ccw(c-1291.64,539.95) R2.2@-1278.84,527.15 ; -1291.64,521.84 cw(c-1291.64,503.74) R2.2@-1278.84,516.54 ; -1291.64,521.84 ccw(c-1291.64,539.95) R2.2@-1278.84,527.15 ; -1291.64,521.84 cw(c-1291.64,503.74) R2.2@-1278.84,516.54 ; -1291.64,521.84 ccw(c-1291.64,539.95) R2.2@-1278.84,527.15 ; -1291.64,521.84 cw(c-1291.64,503.74) R2.2@-1278.84,516.54 ; -1291.64,521.84 ccw(c-1291.64,539.95) R2.2@-1278.84,527.15 ; -1291.64,521.84 cw(c-1291.64,503.74) R2.2@-1278.84,516.54 ; -1291.64,521.84 ccw(c-1291.64,539.95) R2.2@-1278.84,527.15 ; -1291.64,521.84 ccw(c-1291.64,539.95) R2.2@-1278.84,527.15 ; -1291.64,521.84 cw(c-1291.64,503.74) R2.2@-1278.84,516.54 ; -1291.64,521.84 ccw(c-1291.64,539.95) R2.2@-1278.84,527.15 ; -1291.64,521.84 cw(c-1291.64,503.74) R2.2@-1278.84,516.54 ; -1291.64,521.84 ccw(c-1291.64,539.95) R2.2@-1278.84,527.15 ; -1291.64,521.84 cw(c-1291.64,503.74) R2.2@-1278.84,516.54 ; -1291.64,521.84 ccw(c-1291.64,539.95) R2.2@-1278.84,527.15 ; -1291.64,521.84 cw(c-1291.64,503.74) R2.2@-1278.84,516.54 ; v2@-1106.1,519.4 cw(c-1085.72,499.03) -1085.72,527.84 ; v2@-1106.1,519.4 cw(c-1085.72,499.03) -1085.72,527.84 ; v2@-1106.1,519.4 cw(c-1085.72,499.03) -1085.72,527.84 ; v2@-1106.1,519.4 cw(c-1085.72,499.03) -1085.72,527.84 ; v2@-1106.1,519.4 cw(c-1085.72,499.03) -1085.72,527.84 ; v2@-1106.1,519.4 cw(c-1085.72,499.03) -1085.72,527.84 ; v2@-1106.1,519.4 cw(c-1085.72,499.03) -1085.72,527.84 ; v2@-1106.1,519.4 cw(c-1085.72,499.03) -1085.72,527.84 ; v2@-1106.1,519.4 cw(c-1085.72,499.03) -1085.72,527.84 ; -1076.64,527.84 cw(c-1076.64,509.74) R3.2@-1063.84,522.54 ; -1076.64,527.84 ccw(c-1076.64,545.95) R3.2@-1063.84,533.15 ; -1076.64,527.84 cw(c-1076.64,509.74) R3.2@-1063.84,522.54 ; -1076.64,527.84 ccw(c-1076.64,545.95) R3.2@-1063.84,533.15 ; -1076.64,527.84 cw(c-1076.64,509.74) R3.2@-1063.84,522.54 ; -1076.64,527.84 ccw(c-1076.64,545.95) R3.2@-1063.84,533.15 ; -1076.64,527.84 cw(c-1076.64,509.74) R3.2@-1063.84,522.54 ; -1076.64,527.84 ccw(c-1076.64,545.95) R3.2@-1063.84,533.15 ; -1076.64,527.84 cw(c-1076.64,509.74) R3.2@-1063.84,522.54 ; -1076.64,527.84 ccw(c-1076.64,545.95) R3.2@-1063.84,533.15 ; -1076.64,527.84 ccw(c-1076.64,545.95) R3.2@-1063.84,533.15 ; -1076.64,527.84 cw(c-1076.64,509.74) R3.2@-1063.84,522.54 ; -1076.64,527.84 ccw(c-1076.64,545.95) R3.2@-1063.84,533.15 ; -1076.64,527.84 cw(c-1076.64,509.74) R3.2@-1063.84,522.54 ; -1076.64,527.84 ccw(c-1076.64,545.95) R3.2@-1063.84,533.15 ; -1076.64,527.84 cw(c-1076.64,509.74) R3.2@-1063.84,522.54 ; -1076.64,527.84 ccw(c-1076.64,545.95) R3.2@-1063.84,533.15 ; -1076.64,527.84 cw(c-1076.64,509.74) R3.2@-1063.84,522.54 ; C25.1@-895.93,1655.18 ccw(c-908.73,1667.99) -890.62,1667.99 ; C25.1@-895.93,1655.18 ccw(c-908.73,1667.99) -890.62,1667.99 ; C25.1@-895.93,1655.18 ccw(c-908.73,1667.99) -890.62,1667.99 ; C25.1@-895.93,1655.18 ccw(c-908.73,1667.99) -890.62,1667.99 ; C25.1@-895.93,1655.18 ccw(c-908.73,1667.99) -890.62,1667.99 ; C25.1@-895.93,1655.18 ccw(c-908.73,1667.99) -890.62,1667.99 ; C25.1@-895.93,1655.18 ccw(c-908.73,1667.99) -890.62,1667.99 ; C25.1@-895.93,1655.18 ccw(c-908.73,1667.99) -890.62,1667.99 ; C25.1@-895.93,1655.18 ccw(c-908.73,1667.99) -890.62,1667.99 ; R9.2@-895.93,1746.58 cw(c-908.73,1733.77) -890.62,1733.77 ; R9.2@-895.93,1746.58 cw(c-908.73,1733.77) -890.62,1733.77 ; R9.2@-895.93,1746.58 cw(c-908.73,1733.77) -890.62,1733.77 ; R9.2@-895.93,1746.58 cw(c-908.73,1733.77) -890.62,1733.77 ; R9.2@-895.93,1746.58 cw(c-908.73,1733.77) -890.62,1733.77 ; R9.2@-895.93,1746.58 cw(c-908.73,1733.77) -890.62,1733.77 ; R9.2@-895.93,1746.58 cw(c-908.73,1733.77) -890.62,1733.77 ; R9.2@-895.93,1746.58 cw(c-908.73,1733.77) -890.62,1733.77 ; R9.2@-895.93,1746.58 cw(c-908.73,1733.77) -890.62,1733.77 ; -890.62,1667.99 ccw(c-872.52,1667.99) C25.1@-885.32,1655.18 ; -890.62,1667.99 ccw(c-872.52,1667.99) C25.1@-885.32,1655.18 ; -890.62,1667.99 ccw(c-872.52,1667.99) C25.1@-885.32,1655.18 ; -890.62,1667.99 ccw(c-872.52,1667.99) C25.1@-885.32,1655.18 ; -890.62,1667.99 ccw(c-872.52,1667.99) C25.1@-885.32,1655.18 ; -890.62,1667.99 ccw(c-872.52,1667.99) C25.1@-885.32,1655.18 ; -890.62,1667.99 ccw(c-872.52,1667.99) C25.1@-885.32,1655.18 ; -890.62,1667.99 ccw(c-872.52,1667.99) C25.1@-885.32,1655.18 ; -890.62,1667.99 ccw(c-872.52,1667.99) C25.1@-885.32,1655.18 ; -890.62,1733.78 cw(c-872.52,1733.78) R9.2@-885.32,1746.58 ; -890.62,1733.78 cw(c-872.52,1733.78) R9.2@-885.32,1746.58 ; -890.62,1733.78 cw(c-872.52,1733.78) R9.2@-885.32,1746.58 ; -890.62,1733.78 cw(c-872.52,1733.78) R9.2@-885.32,1746.58 ; -890.62,1733.78 cw(c-872.52,1733.78) R9.2@-885.32,1746.58 ; -890.62,1733.78 cw(c-872.52,1733.78) R9.2@-885.32,1746.58 ; -890.62,1733.78 cw(c-872.52,1733.78) R9.2@-885.32,1746.58 ; -890.62,1733.78 cw(c-872.52,1733.78) R9.2@-885.32,1746.58 ; -890.62,1733.78 cw(c-872.52,1733.78) R9.2@-885.32,1746.58 ; v2@-888.1,529.28 ccw(c-872.55,544.83) -872.55,522.84 ; v2@-888.1,529.28 ccw(c-872.55,544.83) -872.55,522.84 ; v2@-888.1,529.28 ccw(c-872.55,544.83) -872.55,522.84 ; v2@-888.1,529.28 ccw(c-872.55,544.83) -872.55,522.84 ; v2@-888.1,529.28 ccw(c-872.55,544.83) -872.55,522.84 ; v2@-888.1,529.28 ccw(c-872.55,544.83) -872.55,522.84 ; v2@-888.1,529.28 ccw(c-872.55,544.83) -872.55,522.84 ; v2@-888.1,529.28 ccw(c-872.55,544.83) -872.55,522.84 ; v2@-888.1,529.28 ccw(c-872.55,544.83) -872.55,522.84 ; -861.64,522.84 cw(c-861.64,504.74) R4.2@-848.84,517.54 ; -861.64,522.84 ccw(c-861.64,540.95) R4.2@-848.84,528.15 ; -861.64,522.84 cw(c-861.64,504.74) R4.2@-848.84,517.54 ; -861.64,522.84 ccw(c-861.64,540.95) R4.2@-848.84,528.15 ; -861.64,522.84 cw(c-861.64,504.74) R4.2@-848.84,517.54 ; -861.64,522.84 ccw(c-861.64,540.95) R4.2@-848.84,528.15 ; -861.64,522.84 cw(c-861.64,504.74) R4.2@-848.84,517.54 ; -861.64,522.84 ccw(c-861.64,540.95) R4.2@-848.84,528.15 ; -861.64,522.84 cw(c-861.64,504.74) R4.2@-848.84,517.54 ; -861.64,522.84 ccw(c-861.64,540.95) R4.2@-848.84,528.15 ; -861.64,522.84 ccw(c-861.64,540.95) R4.2@-848.84,528.15 ; -861.64,522.84 cw(c-861.64,504.74) R4.2@-848.84,517.54 ; -861.64,522.84 ccw(c-861.64,540.95) R4.2@-848.84,528.15 ; -861.64,522.84 cw(c-861.64,504.74) R4.2@-848.84,517.54 ; -861.64,522.84 ccw(c-861.64,540.95) R4.2@-848.84,528.15 ; -861.64,522.84 cw(c-861.64,504.74) R4.2@-848.84,517.54 ; -861.64,522.84 ccw(c-861.64,540.95) R4.2@-848.84,528.15 ; -861.64,522.84 cw(c-861.64,504.74) R4.2@-848.84,517.54 ; v2@-676.1,529.28 ccw(c-662.96,542.42) -662.96,523.84 ; v2@-676.1,529.28 ccw(c-662.96,542.42) -662.96,523.84 ; v2@-676.1,529.28 ccw(c-662.96,542.42) -662.96,523.84 ; v2@-676.1,529.28 ccw(c-662.96,542.42) -662.96,523.84 ; v2@-676.1,529.28 ccw(c-662.96,542.42) -662.96,523.84 ; v2@-676.1,529.28 ccw(c-662.96,542.42) -662.96,523.84 ; v2@-676.1,529.28 ccw(c-662.96,542.42) -662.96,523.84 ; v2@-676.1,529.28 ccw(c-662.96,542.42) -662.96,523.84 ; v2@-676.1,529.28 ccw(c-662.96,542.42) -662.96,523.84 ; -645.64,523.84 cw(c-645.64,505.74) R5.2@-632.84,518.54 ; -645.64,523.84 ccw(c-645.64,541.95) R5.2@-632.84,529.15 ; -645.64,523.84 cw(c-645.64,505.74) R5.2@-632.84,518.54 ; -645.64,523.84 ccw(c-645.64,541.95) R5.2@-632.84,529.15 ; -645.64,523.84 cw(c-645.64,505.74) R5.2@-632.84,518.54 ; -645.64,523.84 ccw(c-645.64,541.95) R5.2@-632.84,529.15 ; -645.64,523.84 cw(c-645.64,505.74) R5.2@-632.84,518.54 ; -645.64,523.84 ccw(c-645.64,541.95) R5.2@-632.84,529.15 ; -645.64,523.84 cw(c-645.64,505.74) R5.2@-632.84,518.54 ; -645.64,523.84 ccw(c-645.64,541.95) R5.2@-632.84,529.15 ; -645.64,523.84 ccw(c-645.64,541.95) R5.2@-632.84,529.15 ; -645.64,523.84 cw(c-645.64,505.74) R5.2@-632.84,518.54 ; -645.64,523.84 ccw(c-645.64,541.95) R5.2@-632.84,529.15 ; -645.64,523.84 cw(c-645.64,505.74) R5.2@-632.84,518.54 ; -645.64,523.84 ccw(c-645.64,541.95) R5.2@-632.84,529.15 ; -645.64,523.84 cw(c-645.64,505.74) R5.2@-632.84,518.54 ; -645.64,523.84 ccw(c-645.64,541.95) R5.2@-632.84,529.15 ; -645.64,523.84 cw(c-645.64,505.74) R5.2@-632.84,518.54
  TopLayer w18: R21.2@-1780.62,1547.88 -1780.62,1270.84 -1676.62,1166.84 U8.5@-1639.54,1166.84 ; -1455.54,772.84 -1413.54,814.84 v2(-1413.54,970.84) ; U8.38@-1382.54,1360.84 -1382.54,1475.84 -1305.5,1552.88 -980.57,1552.88 -925.54,1497.84 -821.54,1497.84 -792.54,1526.84 -792.54,1678.84 -812.54,1698.84 -890.62,1698.84 ; v2(-1348.54,1137.84) -1333.54,1152.84 -1244.54,1152.84 ; U8.29@-1187.54,1166.84 -1230.54,1166.84 -1244.54,1152.84 ; C45.1@-1099.54,1094.84 -1108.54,1103.84 U8.27@-1187.54,1103.84 -1229.54,1103.84 -1244.54,1118.84 -1244.54,1152.84 ; R24.2@-998,1547.48 cw(c-987.53,1525.88) -970.55,1542.86 ; U1.4@-731.54,1064.84 -731.54,1213.84 -691.54,1253.84 -447.54,1253.84 -397.54,1303.84 -397.54,1426.84 -374.54,1449.84 -94.54,1449.84 -69.54,1424.84 ISP.2@-69.54,1354.84 ; v2@-601.54,1255.84 U1.20@-601.54,1351.84 ; ISP.2@-89.33,1374.64 ccw(c-137.13,1422.44) -69.54,1422.44 ccw(c-1.94,1422.44) ISP.2@-49.74,1374.64 ; -1687.29,1177.51 ccw(c-1661.54,1203.26) U8.5@-1661.54,1166.84 ; -1687.29,1177.51 ccw(c-1661.54,1203.26) U8.5@-1661.54,1166.84 ; -1687.29,1177.51 ccw(c-1661.54,1203.26) U8.5@-1661.54,1166.84 ; -1687.29,1177.51 ccw(c-1661.54,1203.26) U8.5@-1661.54,1166.84 ; -1687.29,1177.51 ccw(c-1661.54,1203.26) U8.5@-1661.54,1166.84 ; -1687.29,1177.51 ccw(c-1661.54,1203.26) U8.5@-1661.54,1166.84 ; -1319.19,1539.19 cw(c-1300.62,1520.63) R35.2@-1300.62,1546.88 ; -1319.19,1539.19 cw(c-1300.62,1520.63) R35.2@-1300.62,1546.88 ; -1319.19,1539.19 cw(c-1300.62,1520.63) R35.2@-1300.62,1546.88 ; -1319.19,1539.19 cw(c-1300.62,1520.63) R35.2@-1300.62,1546.88 ; -1319.19,1539.19 cw(c-1300.62,1520.63) R35.2@-1300.62,1546.88 ; -1319.19,1539.19 cw(c-1300.62,1520.63) R35.2@-1300.62,1546.88 ; -1319.19,1539.19 cw(c-1300.62,1520.63) R35.2@-1300.62,1546.88 ; -1319.19,1539.19 cw(c-1300.62,1520.63) R35.2@-1300.62,1546.88 ; -1319.19,1539.19 cw(c-1300.62,1520.63) R35.2@-1300.62,1546.88 ; R24.2@-1000.62,1546.88 cw(c-1000.62,1483.99) -956.16,1528.46 ; R24.2@-1000.62,1546.88 cw(c-1000.62,1483.99) -956.16,1528.46 ; R24.2@-1000.62,1546.88 cw(c-1000.62,1483.99) -956.16,1528.46 ; R24.2@-1000.62,1546.88 cw(c-1000.62,1483.99) -956.16,1528.46 ; R24.2@-1000.62,1546.88 cw(c-1000.62,1483.99) -956.16,1528.46 ; R24.2@-1000.62,1546.88 cw(c-1000.62,1483.99) -956.16,1528.46 ; R24.2@-1000.62,1546.88 cw(c-1000.62,1483.99) -956.16,1528.46 ; R24.2@-1000.62,1546.88 cw(c-1000.62,1483.99) -956.16,1528.46 ; R24.2@-1000.62,1546.88 cw(c-1000.62,1483.99) -956.16,1528.46 ; R24.2@-1000.62,1564.88 cw(c-1000.62,1545.45) R24.2@-986.88,1559.19 ; R24.2@-1000.62,1564.88 cw(c-1000.62,1545.45) R24.2@-986.88,1559.19 ; R24.2@-1000.62,1564.88 cw(c-1000.62,1545.45) R24.2@-986.88,1559.19 ; R24.2@-1000.62,1564.88 cw(c-1000.62,1545.45) R24.2@-986.88,1559.19 ; R24.2@-1000.62,1564.88 cw(c-1000.62,1545.45) R24.2@-986.88,1559.19 ; R24.2@-1000.62,1564.88 cw(c-1000.62,1545.45) R24.2@-986.88,1559.19 ; R24.2@-1000.62,1564.88 cw(c-1000.62,1545.45) R24.2@-986.88,1559.19 ; R24.2@-1000.62,1564.88 cw(c-1000.62,1545.45) R24.2@-986.88,1559.19 ; R24.2@-1000.62,1564.88 cw(c-1000.62,1545.45) R24.2@-986.88,1559.19 ; v2@-605.92,1257.22 ccw(c-616.49,1267.8) -601.54,1267.8 cw(c-616.49,1267.8) v2@-605.92,1257.22
  TopLayer w20: R18.2@-3685.62,1547.88 R27.2@-3585.62,1547.88 R15.2@-3385.62,1547.88 ; v2(-3317.54,1701.84) -3275.62,1701.84 ; C13.1@-3275.62,1649.88 -3275.62,1701.84 ; R6.2@-3275.62,1751.88 -3275.62,1701.84
  TopLayer w25: v2(-3894.54,2307.84) -3927.54,2274.84 -3927.54,1555.84 -3861.54,1489.84 -3743.66,1489.84 R18.2@-3685.62,1547.88 ; v2(-3424.54,1475.84) -3424.54,1545.88 ; DP2.2@-3252.52,1345 -3174,1345 -3110,1409 -2943,1409 v2@-2931,1397 ; v2(-2932,1549) -2931.16,1549.84 R29.2@-2889.54,1549.84 R30.2@-2789.54,1549.84 R31.2@-2689.54,1549.84 -2563.84,1549.84 -2500.84,1486.84 -2310.54,1486.84 -2249.5,1547.88 R21.2@-1780.62,1547.88 ; v2(-1919.54,864.84) -1850.54,795.84 C43.1@-1850.54,772.84 -1455.54,772.84 ; v2(-1523.54,653.84) -1523.54,766.84 ; -1871.07,816.37 cw(c-1914.6,772.84) C43.1@-1853.04,772.84 ; -1871.07,816.37 cw(c-1914.6,772.84) C43.1@-1853.04,772.84 ; -1871.07,816.37 cw(c-1914.6,772.84) C43.1@-1853.04,772.84 ; -1871.07,816.37 cw(c-1914.6,772.84) C43.1@-1853.04,772.84 ; -1871.07,816.37 cw(c-1914.6,772.84) C43.1@-1853.04,772.84 ; -1871.07,816.37 cw(c-1914.6,772.84) C43.1@-1853.04,772.84 ; -1871.07,816.37 cw(c-1914.6,772.84) C43.1@-1853.04,772.84
  TopLayer w30: v2@-2931,1391 v2(-2931,1430)
  TopLayer w40: v2@-2931,1391 -2915,1375 FP1.2@-2835.35,1375
  BottomLayer w10: -1563.54,531.84 ccw(c-1555.54,563.84) -1523.54,555.84 ; -632.54,523.84 cw(c-640.04,485.34) -601.54,477.84 ; -629.54,531.84 ccw(c-630.54,560.84) -601.54,561.84 ; -1523.54,622.65 cw(c-1502.34,622.65) -1517.33,637.63 ccw(c-1502.34,622.65) -1523.54,622.65 ; -1523.54,622.65 ccw(c-1544.73,622.65) -1529.74,637.63 cw(c-1544.73,622.65) -1523.54,622.65 ; -659.34,524.84 cw(c-659.34,546.04) -674.33,531.05 ccw(c-659.34,546.04) -659.34,524.84 ; -659.34,524.84 ccw(c-659.34,503.65) -674.33,518.63 cw(c-659.34,503.65) -659.34,524.84
  BottomLayer w15: -601.54,535.84 -601.54,421.84 -572.54,392.84 -135.54,392.84 -114.54,413.84 ; EXP1.1@-132.78,453.69 cw(c-167.17,413.85) -114.54,413.85 ; EXP1.1@-114.54,474.84 -114.54,413.84 ; EXP1.1@-96.29,453.69 ccw(c-61.9,413.85) -114.54,413.85
  BottomLayer w18: v2(-1413.54,970.84) -1413.54,1218.84 -1382.54,1249.84 v2(-1382.54,1448.84) ; -1413.54,1137.84 v2(-1348.54,1137.84) ; -601.54,535.84 v2@-601.54,1253.84 ; v2@-605.92,1250.46 cw(c-616.49,1239.89) -601.54,1239.89 ccw(c-616.49,1239.89) v2@-605.92,1250.46
  BottomLayer w20: -3347.54,1398.84 -3347.54,1671.84 v2(-3317.54,1701.84)
  BottomLayer w25: v2(-3894.54,2307.84) v2(-1508.54,2307.84) ; v2(-3424.54,1475.84) -3347.54,1398.84 -3259.54,1310.84 -3025.54,1310.84 v2@-2932.14,1404.24 ; v2@-2932,1404.1 v2(-2932,1549) ; v2(-2362.54,1487.84) -2362.54,1309.62 -2048.92,996 -2021,996 -1969.54,944.54 -1969.54,914.84 v2(-1919.54,864.84) ; -1560.54,523.84 v2(-1541.54,523.84) -606.54,523.84 ; -1523.54,524.84 v2(-1523.54,653.84) ; -1523.54,579.63 ccw(c-1448.75,579.63) -1501.63,526.75
  other v2: -1316.54,522.84 -892.54,524.84 -680.54,524.84 -602.54,1253.84 -2931,1403
VDD: C31.1 TF.4 U1.17 U2.20 | length 2279.9
  TopLayer w10: v2@-739.54,1881.84 -739.54,2051.84 ; v2(-726.54,2064.84) -739.54,2051.84 ; v2(-632.54,2351.84) TF.4@-575.54,2351.84 ; v2(-614.54,1652.84) -614.54,1524.84 -523.54,1433.84 U1.17@-523.54,1351.84 ; -739.53,2051.84 cw(c-729.03,2041.34) -727.46,2056.11 ccw(c-729.03,2041.34) -739.53,2051.84 ; -739.53,2051.84 ccw(c-750.04,2062.35) -735.27,2063.92 cw(c-750.04,2062.35) -739.53,2051.84 ; -615.85,2351.84 cw(c-615.85,2332.53) -602.19,2346.19 ccw(c-615.85,2332.53) -615.85,2351.84 ; -615.85,2351.84 ccw(c-615.85,2371.16) -602.19,2357.5 cw(c-615.85,2371.16) -615.85,2351.84 ; -614.54,1536.56 cw(c-566.25,1536.56) -600.39,1570.7 ccw(c-566.25,1536.56) -614.54,1536.56 ; -614.54,1536.56 ccw(c-662.82,1536.56) -628.68,1570.7 cw(c-662.82,1536.56) -614.54,1536.56 ; -614.54,1631.65 cw(c-593.34,1631.65) -608.33,1646.63 ccw(c-593.34,1631.65) -614.54,1631.65 ; -614.54,1631.65 ccw(c-635.73,1631.65) -620.74,1646.63 cw(c-635.73,1631.65) -614.54,1631.65 ; -614.54,1633.13 cw(c-662.82,1633.13) -628.68,1598.98 ccw(c-662.82,1633.13) -614.54,1633.13 ; -614.54,1633.13 ccw(c-566.25,1633.13) -600.39,1598.98 cw(c-566.25,1633.13) -614.54,1633.13 ; -611.34,2351.84 cw(c-611.34,2373.04) -626.33,2358.05 ccw(c-611.34,2373.04) -611.34,2351.84 ; -611.34,2351.84 ccw(c-611.34,2330.65) -626.33,2345.63 cw(c-611.34,2330.65) -611.34,2351.84 ; v2@-744.74,1887.05 ccw(c-757.32,1899.62) -739.54,1899.62 cw(c-757.32,1899.62) v2@-744.74,1887.05 ; -739.54,1904.45 ccw(c-714.93,1904.45) -732.33,1887.05 cw(c-714.93,1904.45) -739.54,1904.45 ; -739.54,2012.26 cw(c-673.96,2012.26) -720.33,2058.63 ccw(c-673.96,2012.26) -739.54,2012.26 ; -739.54,2036.4 cw(c-698.1,2036.4) -727.4,2065.71 ccw(c-698.1,2036.4) -739.54,2036.4
  BottomLayer w10: v2(-738.54,1880.84) -738.54,1776.84 v2(-614.54,1652.84) ; v2(-726.54,2064.84) -726.54,2324.84 -699.54,2351.84 v2(-632.54,2351.84) ; -738.54,1859.65 cw(c-717.34,1859.65) -732.33,1874.63 ccw(c-717.34,1859.65) -738.54,1859.65 ; -738.54,1859.65 ccw(c-759.73,1859.65) -744.74,1874.63 cw(c-759.73,1859.65) -738.54,1859.65 ; -726.54,2086.04 cw(c-747.73,2086.04) -732.74,2071.05 ccw(c-747.73,2086.04) -726.54,2086.04 ; -726.54,2086.04 ccw(c-705.34,2086.04) -720.33,2071.05 cw(c-705.34,2086.04) -726.54,2086.04 ; -653.73,2351.84 cw(c-653.73,2330.65) -638.74,2345.63 ccw(c-653.73,2330.65) -653.73,2351.84 ; -653.73,2351.84 ccw(c-653.73,2373.04) -638.74,2358.05 cw(c-653.73,2373.04) -653.73,2351.84 ; -629.52,1667.83 cw(c-644.51,1652.84) -623.31,1652.84 ccw(c-644.51,1652.84) -629.52,1667.83 ; -629.52,1667.83 ccw(c-614.54,1682.82) -614.54,1661.62 cw(c-614.54,1682.82) -629.52,1667.83